# Altium PCB LMAT_AMT_V1.PcbDoc (part 2 of 2)
Units mm, origin at the board's own origin, x right, y up, seen from the top; angles counter-clockwise.
Board outline 36.5 x 40.75 mm, 2 copper layers (Top Layer, Bottom Layer), stack 1.58 mm thick; 104 components, 51 nets, 244 pads, 110 vias.
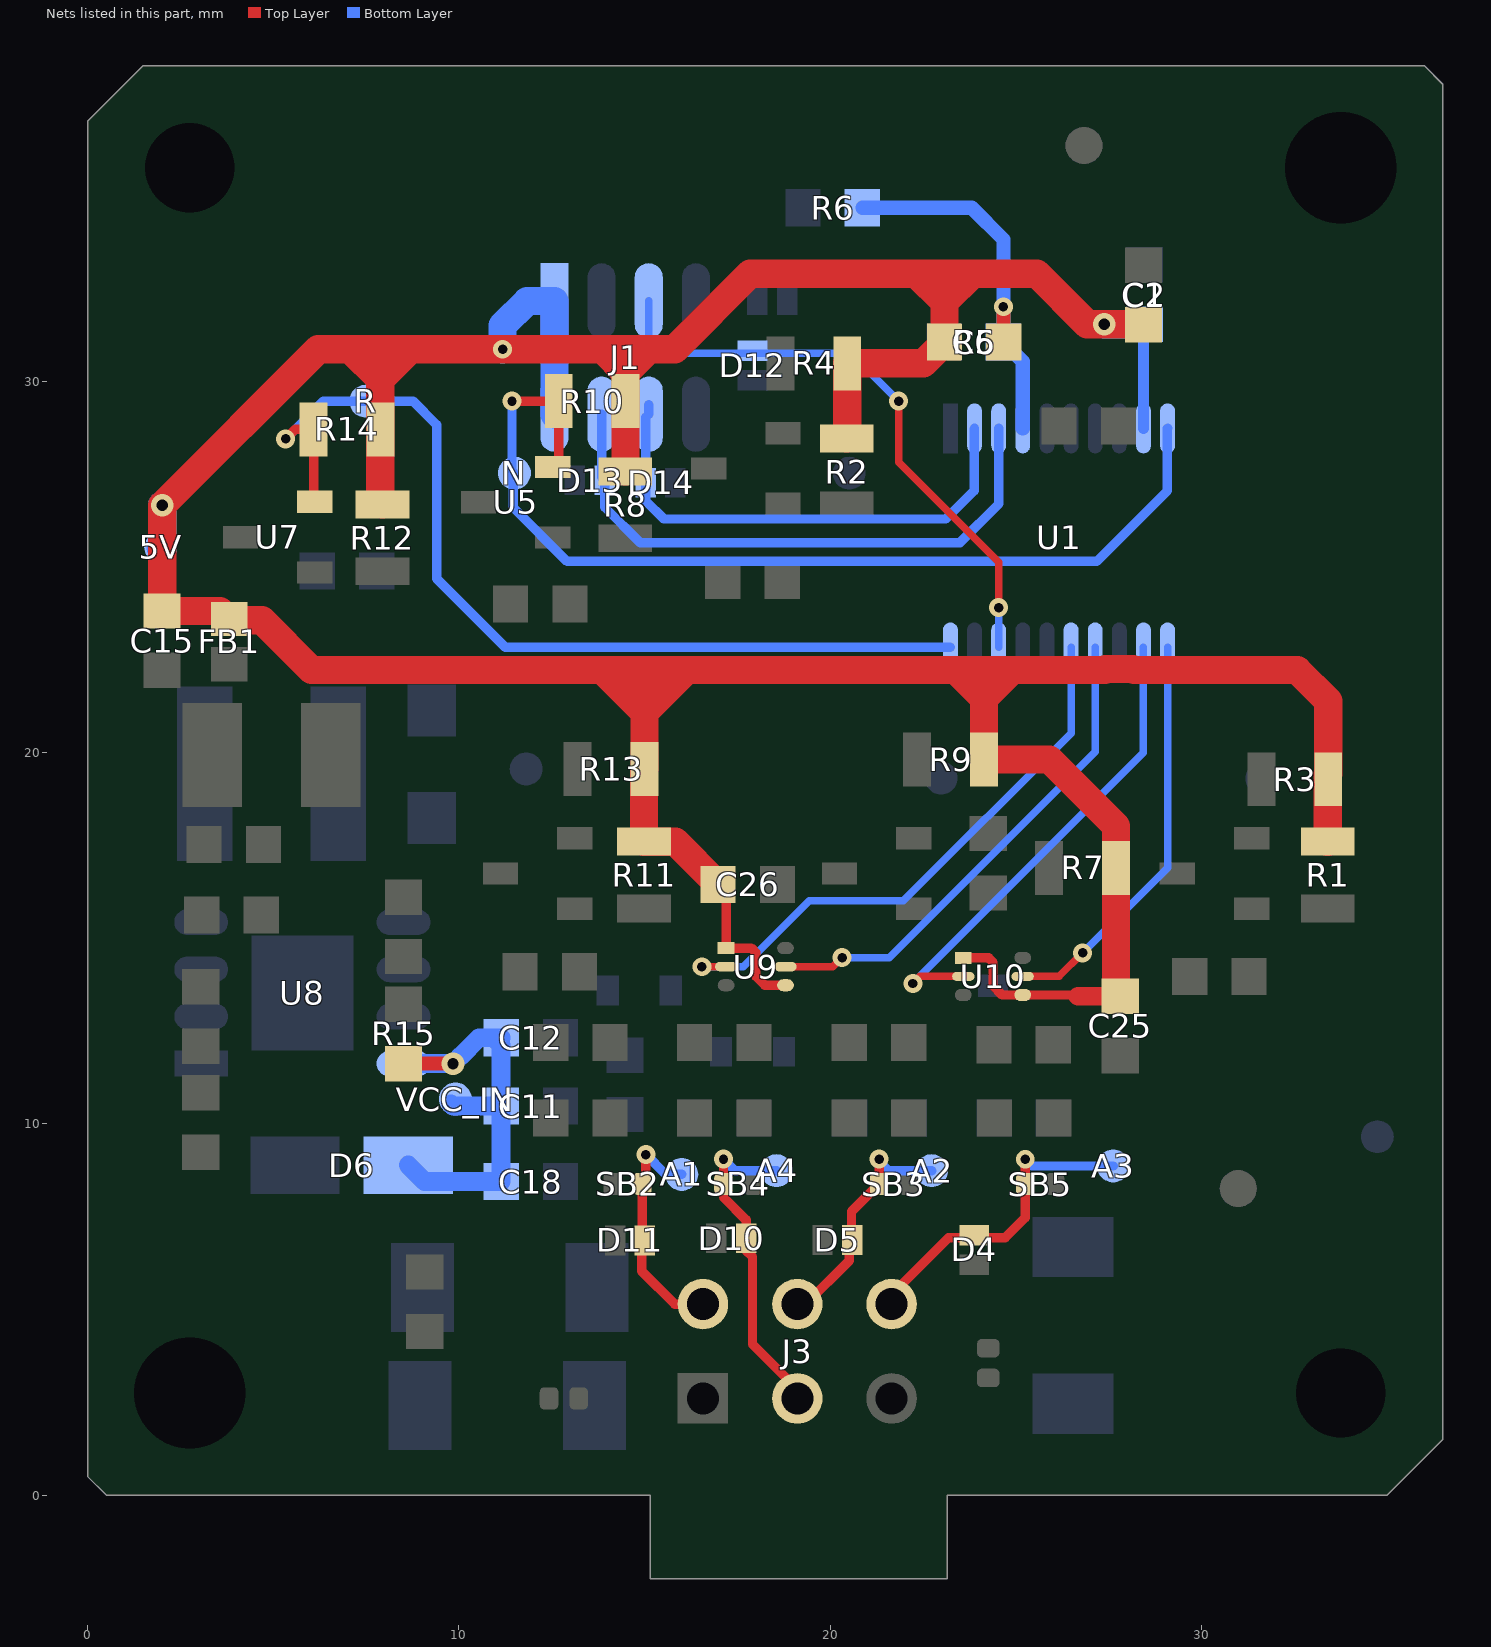
[diagram p2: the nets of this part, all layers, seen from the top]

## Via types
v1: diameter 0.508, hole 0.254, Top Layer to Bottom Layer, tented both sides, 64 vias
v2: diameter 0.61, hole 0.305, Top Layer to Bottom Layer, tented both sides, 46 vias

## Nets (pads, with @x,y where several pads share a name; then routed paths per layer and width w, separated by ;. In a path a pad name is that pad's centre, name@x,y a point inside that pad or via, vN(x,y) a via of type N, cw(c..) or ccw(c..) an arc to the next point about the centre after c; other vN are vias at no path point) (continued)
NEUTRAL: N.1 R10.2 U1.10 U5.2 | length 26.7
  Top Layer w0.254: v1(11.43,29.464) R10.2@12.689,29.464 12.689,27.849 U5.2@12.53,27.69
  Bottom Layer w0.254: v1(11.43,29.464) 11.43,27.588 11.462,27.555 11.462,26.598 12.914,25.146 27.178,25.146 29.083,27.051 29.083,28.727 U1.10@29.087,28.731
nRESET: C6.1 R5.1 R6.2 U1.4 | length 10.4
  Top Layer w0.254: R5.1@24.663,31.064 R5.1@24.676,31.051
  Top Layer w0.381: R5.1@24.663,31.064 v1(24.663,32.004)
  Bottom Layer w0.381: R6.2@20.866,34.671 23.812,34.671 24.663,33.82 v1(24.663,32.004) C6.1@24.663,31.056 25.187,30.532 U1.4@25.187,28.731
REVERSE: R14.2 R.1 U1.20 U7.2 | length 26.3
  Top Layer w0.254: v1(5.334,28.448) 5.588,28.702 R14.2@6.085,28.702 6.085,26.785 U7.2@6.12,26.75
  Bottom Layer w0.254: v1(5.334,28.448) 6.35,29.464 R.1@7.493,29.464 8.763,29.464 9.398,28.829 9.398,24.684 11.251,22.831 U1.20@23.237,22.831
S1: U1.14 U9.5 | length 13.5
  Top Layer w0.203: U9.5@18.796,14.232 20.074,14.232 v1(20.32,14.478)
  Bottom Layer w0.203: v1(20.32,14.478) 21.593,14.478 27.137,20.022 U1.14@27.137,22.831
S2: U1.11 U10.5 | length 11.1
  Top Layer w0.203: U10.5@25.184,13.97 26.162,13.97 v1(26.797,14.605)
  Bottom Layer w0.203: v1(26.797,14.605) 29.087,16.895 U1.11@29.087,22.831
S3: U1.12 U10.2 | length 13.1
  Top Layer w0.203: v1(22.225,13.779) 22.416,13.97 U10.2@23.584,13.97
  Bottom Layer w0.203: v1(22.225,13.779) 28.437,19.991 U1.12@28.437,22.831
S4: U1.15 U9.2 | length 15.5
  Top Layer w0.203: v1(16.543,14.232) U9.2@17.196,14.232
  Bottom Layer w0.203: v1(16.543,14.232) 17.661,14.232 19.431,16.002 21.971,16.002 26.487,20.518 U1.15@26.487,22.831
SIGNAL1: A1.1 D11.2 J3.4 SB2.2 | length 6.4
  Top Layer w0.254: v1(15.037,9.169) 15.037,8.477 SB2.2@14.941,8.382 14.941,6.615 14.93,6.604 14.93,6.025 15.811,5.143 J3.4@16.573,5.143
  Bottom Layer w0.254: v1(15.037,9.169) 15.57,8.636 A1.1@16.002,8.636
SIGNAL2: A2.1 D5.2 J3.5 SB3.2 | length 6.5
  Top Layer w0.254: J3.5@19.113,5.143 19.342,5.143 20.518,6.319 D5.2@20.518,6.869 ; D5.2@20.574,6.869 20.574,7.639 21.317,8.382 v1(21.317,9.049)
  Bottom Layer w0.254: v1(21.317,9.049) 21.317,8.998 21.577,8.738 A2.1@22.733,8.738
SIGNAL3: A3.1 D4.2 J3.6 SB5.2 | length 8.7
  Top Layer w0.254: J3.6@21.653,5.143 21.653,5.397 23.185,6.929 24.709,6.929 25.254,7.474 SB5.2@25.254,8.377 v1(25.254,9.044)
  Bottom Layer w0.254: v1(25.254,9.044) 25.433,8.865 A3.1@27.624,8.865
SIGNAL4: A4.1 D10.2 J3.2 SB4.2 | length 8.8
  Top Layer w0.254: v1(17.126,9.049) SB4.2@17.126,8.382 17.126,8.02 17.736,7.41 D10.2@17.736,6.92 17.736,6.591 17.907,6.419 17.907,4.064 19.113,2.857 J3.2@19.113,2.603
  Bottom Layer w0.254: v1(17.126,9.049) 17.437,8.738 A4.1@18.554,8.738
SWIM: D12.2 J1.5 U1.18 | length 16.2
  Top Layer w0.203: v1(21.844,29.464) 21.844,27.813 24.537,25.12 v1(24.537,23.901)
  Bottom Layer w0.203: J1.5@15.113,32.163 15.113,31.115 15.479,30.749 20.559,30.749 v1(21.844,29.464) ; U1.18@24.537,22.831 v1(24.537,23.901)
UART_RX: D13.2 J1.4 U1.3 | length 16
  Bottom Layer w0.254: J1.4@13.843,29.113 13.843,27.413 D13.2@13.925,27.33 13.925,26.607 14.878,25.654 23.495,25.654 24.537,26.696 U1.3@24.537,28.731
UART_TX: D14.2 J1.6 U1.2 | length 13.7
  Bottom Layer w0.254: J1.6@15.113,29.369 J1.6@15.113,29.113 15.03,29.03 D14.2@15.03,27.267 15.03,26.778 15.519,26.289 23.114,26.289 23.876,27.051 23.876,28.72 U1.2@23.887,28.731
VCC_5V: 5V.1 C1.1 C2.2 C15.1 C25.1 C26.1 FB1.2 J1.1 J1.2 R1.2 R2.2 R3.1 R4.1 R5.2 R7.2 R8.2 R9.1 R10.1 R11.2 R12.2 R13.1 R14.1 U1.9 U9.1 U9.4 U10.1 U10.4 | length 132.4
  Top Layer w0.254: C26.1@16.98,16.447 17.196,16.23 U9.1@17.196,14.732 17.877,14.732 17.996,14.613 17.996,13.978 18.242,13.732 U9.4@18.796,13.732 ; U10.1@23.584,14.47 24.265,14.47 24.384,14.351 24.384,13.716 24.63,13.47 U10.4@25.184,13.47 26.637,13.47 26.67,13.437
  Top Layer w0.508: 26.67,13.437 C25.1@27.813,13.437
  Top Layer w0.762: 7.874,30.861 7.07,30.861 ; R12.2@7.938,26.681 7.885,26.734 R14.1@7.885,28.702 7.885,30.046 ; 13.865,30.85 14.489,30.226 ; R8.2@14.478,27.57 14.489,27.581 R10.1@14.489,29.464 14.489,30.226 ; R13.1@14.986,19.547 R11.2@14.986,17.601 15.826,17.601 C26.1@16.98,16.447 ; R13.1@14.997,19.558 14.997,21.082 ; R2.2@20.447,28.459 20.458,28.47 R4.1@20.458,30.48 22.504,30.48 R5.2@23.076,31.051 23.076,32.131 ; C25.1@27.78,13.47 27.697,13.552 R7.2@27.697,16.891 27.697,18.023 25.908,19.812 R9.1@24.141,19.812 24.141,21.463 ; C1.1@28.435,31.521 28.423,31.534 v2(27.381,31.534) 26.924,31.534 25.565,32.893 23.838,32.893 ; R1.2@33.401,17.601 33.401,19.42 33.412,19.431 33.412,21.389 32.575,22.225 28.181,22.225 28.155,22.251 27.419,22.251 27.393,22.225 24.903,22.225 ; 7.07,30.861 6.21,30.861 v2(2.007,26.657) C15.1@2.007,23.812 3.559,23.812 3.81,23.562 4.696,23.562 6.032,22.225 13.854,22.225 ; 7.07,30.861 7.885,30.046 ; 7.885,30.046 8.7,30.861 ; 7.885,30.046 7.885,30.861 8.7,30.861 ; 8.7,30.861 v1(11.176,30.861) 14.489,30.861 ; 13.854,22.225 14.997,21.082 ; 13.854,22.225 14.986,22.225 ; 14.489,30.226 14.489,30.861 ; 14.489,30.226 15.113,30.85 15.113,30.861 ; 14.489,30.861 15.113,30.861 ; 14.986,22.225 14.997,22.214 14.997,21.082 ; 14.986,22.225 16.14,22.225 ; 14.997,21.082 16.14,22.225 ; 15.113,30.861 15.811,30.861 17.843,32.893 22.314,32.893 ; 16.14,22.225 23.379,22.225 ; 22.314,32.893 23.076,32.131 ; 22.314,32.893 23.076,32.893 ; 23.076,32.131 23.838,32.893 ; 23.076,32.131 23.076,32.893 ; 23.076,32.893 23.838,32.893 ; 23.379,22.225 24.141,21.463 ; 23.379,22.225 24.13,22.225 ; 24.13,22.225 24.141,22.214 24.141,21.463 ; 24.13,22.225 24.903,22.225 ; 24.141,21.463 24.903,22.225
  Bottom Layer w0.305: U1.9@28.437,28.731 C2.2@28.437,31.498
  Bottom Layer w0.762: 5V.1@1.968,25.527 2.007,25.565 v2(2.007,26.657) ; v1(11.176,30.861) 11.176,31.496 11.843,32.163 J1.1@12.573,32.163 J1.2@12.573,29.113 ; v2(27.381,31.534) 28.401,31.534 C2.2@28.437,31.498
VCC_IN: C11.2 C12.1 C18.1 D6.1 R15.2 U8.8 VCC_IN.1 | length 12.3
  Top Layer w0.381: R15.2@8.509,11.62 v2(9.842,11.62)
  Bottom Layer w0.381: v2(9.842,11.62) v2@10.033,11.811
  Bottom Layer w0.508: U8.8@8.509,11.62 v2(9.842,11.62) ; D6.1@8.637,8.89 9.082,8.445 C18.1@11.138,8.445 C11.2@11.138,10.478 ; VCC_IN.1@9.779,10.541 9.842,10.478 C11.2@11.138,10.478 ; v2@10.033,11.811 10.541,12.319 C12.1@10.935,12.319 ; C12.1@11.138,12.319 C12.1@10.935,12.319 ; C12.1@10.935,12.319 11.138,12.116 C11.2@11.138,10.478
pads on no net: FID1.0 FID2.0 FID3.0 FID4.0 U1.5 U1.6 U1.17

## Polygon pours and split planes (outlines as drawn)
GND on Top Layer "GND_L01_P070" (solid, remove dead copper, pour order 70): 0.5,0 35,0 36.5,1.5 36.5,38 36,38.5 1.5,38.5 0,37 0,0.5
GND on Bottom Layer "GND_L02_P071" (solid, remove dead copper, pour order 71): 35,0 36.5,1.5 36.5,38 36,38.5 1.5,38.5 0,37 0,0.5 0.5,0

## Keep-outs
Keep-Out Layer:
  lines w0.127: 0,5.651 cw(c2.749,2.749) 5.651,0 ; 0,32.842 ccw(c2.75,35.75) 5.649,38.51 ; 30.842,38.5 ccw(c33.744,35.744) 36.5,32.842 ; 30.861,0 cw(c33.745,2.762) 36.5,5.652 ; 1.5,38.5 36,38.5 36.5,38 36.5,1.5 35,0 23.15,0 23.15,-2.25 15.15,-2.25 15.15,0 0.5,0 0,0.5 0,37 1.5,38.5 ; 1.5,38.5 1.5,38.5
  text "'.Layer_Name'" at 402.844,-241.071 h3.81

## Other copper
Top Layer:
  pour cut-out: 8.572,24.118 8.572,23.114 8.318,23.114 8.318,24.118
  pour cut-out: 11.938,27.223 11.938,26.257 11.684,26.257 11.684,27.223
  pour cut-out: 18.572,13.169 18.784,13.169 18.784,12.903 18.572,12.903
  pour cut-out: 22.132,13.064 21.92,13.064 21.92,13.33 22.132,13.33
  pour cut-out: 23.709,12.81 23.709,12.598 23.195,12.598 23.195,12.81
  pour cut-out: 15.961,15.616 15.961,15.828 16.475,15.828 16.475,15.616
  pour cut-out: 12.985,21.015 12.773,21.015 12.773,21.53 12.985,21.53
  pour cut-out: 23.143,15.16 23.355,15.16 23.355,14.894 23.143,14.894
  pour cut-out: 26.424,17.842 26.274,17.992 26.462,18.18 26.612,18.03
  pour cut-out: 21.6,20.59 21.6,21.53 21.866,21.53 21.866,20.59
  pour cut-out: 21.483,27.266 22.035,27.266 22.035,27 21.483,27
  pour cut-out: 25.462,31.455 25.462,31.667 25.947,31.667 25.947,31.455
  pour cut-out: 28.031,30.656 28.243,30.656 28.243,30.39 28.031,30.39
  pour cut-out: 31.949,17.107 32.389,17.107 32.372,17.09 32.372,16.209 32.112,16.209 31.944,16.377
  text "'.Layer_Name'" at 396.875,-241.325 h3.81
Bottom Layer:
  pour cut-out: 10.951,30.038 11.006,30.092 11.334,30.092 11.303,29.718 11.247,29.662 10.951,29.662
  pour cut-out: 14.458,14.348 15.26,14.348 15.26,14.117 15.24,14.097 14.478,14.097
  pour cut-out: 10.225,6.937 10.225,7.936 10.16,8.001 9.906,8.001 9.906,6.985
  pour cut-out: 27.477,9.469 27.477,9.752 27.611,9.752 27.624,9.74 27.624,9.469
  pour cut-out: 22.859,18.78 22.859,17.145 22.408,17.145 22.397,18.78
  pour cut-out: 21.844,20.39 21.844,19.742 21.406,19.742 21.402,20.39
  pour cut-out: 7.397,11.62 7.397,10.094 7.559,9.931 8.509,9.931 8.509,11.62
  pour cut-out: 23.431,13.028 23.46,13.057 23.835,13.057 23.835,13.198 23.766,13.267 23.404,13.267
  pour cut-out: 18.491,27.322 18.491,26.842 18.445,26.797 18.923,26.797 18.923,27.305
  pour cut-out: 23.437,29.794 23.368,29.863 23.368,30.34 23.749,30.34 23.749,29.762
  pour cut-out: 7.622,16.794 7.926,16.794 7.926,16.961 7.92,16.954 7.785,16.954
  pour cut-out: 18.35,31.686 18.161,31.686 18.161,31.261 18.35,31.261
  pour cut-out: 10.54,14.348 10.54,13.11 10.544,13.106 10.185,13.106 10.185,14.351
  pour cut-out: 13.97,26.715 13.97,25.67 14.351,25.67 14.351,26.692
  pour cut-out: 17.03,29.808 17.424,29.808 17.424,29.928 17.348,30.004 17.335,29.991 17.03,29.991
  text "'.Layer_Name'" at 400.05,-241.325 h3.81

## Silkscreen, mask and mechanical layers (free items; w line width, h text height)
Top Overlay:
  text "LMAT_AMT_V1" at 9.995,34.176 h2.03
  text "'.Layer_Name'" at 400.177,-241.071 h3.81
Bottom Overlay:
  lines w0.127: 13.081,14.351 13.081,13.335 13.843,12.573 13.843,12.446 ; 13.386,9.779 13.716,9.449
  lines w0.203: 3.861,10.566 4.564,10.566 ; 3.886,10.332 3.655,10.564 3.886,10.795
  text "'.Layer_Name'" at 401.193,-240.69 h3.81
Top Paste:
  text "'.Layer_Name'" at 404.876,-240.817 h3.81
Bottom Paste:
  text "'.Layer_Name'" at 404.876,-241.325 h3.81
Top Solder:
  rectangle: 23.19,13.106 25.552,14.834
  rectangle: 16.815,13.368 19.164,15.096
  rectangle: 23.495,5.969 24.257,7.239
  region: 19.558,7.25 19.558,6.488 20.828,6.488 20.828,7.25
  region: 16.7,7.301 16.7,6.539 17.97,6.539 17.97,7.301
  region: 13.97,7.239 13.97,6.477 15.24,6.477 15.24,7.239
  text "'.Layer_Name'" at 407.162,-240.817 h3.81
Bottom solder:
  region: 16.044,26.784 16.044,27.75 14.774,27.75 14.774,26.784
  region: 14.139,26.848 14.139,27.813 12.869,27.813 12.869,26.848
  region: 19.082,31.813 19.082,32.575 17.812,32.575 17.812,31.813
  rectangle: 17.534,29.797 18.296,31.067
Drill Guide:
  text "'.Layer_Name'" at 408.178,-241.198 h3.81
Fabrication Notes:
  drawing of 191 lines, arcs and shapes, not listed
  text "Layer" at 123.685,144.691 h1.52
  text "Name" at 134.097,144.691 h1.52
  text "Material" at 157.713,144.691 h1.52
  text "Thickness" at 179.551,144.691 h1.52
  text "Constant" at 196.056,144.691 h1.52
  text "Board Layer Stack" at 210.531,144.691 h1.52
  text "1" at 123.685,141.643 h1.52
  text "Top Overlay" at 134.097,141.643 h1.52
  text "2" at 123.685,138.595 h1.52
  text "Top Solder" at 134.097,138.595 h1.52
  text "Solder Resist" at 157.713,138.595 h1.52
  text "0.40mil" at 179.551,138.595 h1.52
  text "3.5" at 196.056,138.595 h1.52
  text "3" at 123.685,135.547 h1.52
  text "Top Layer" at 134.097,135.547 h1.52
  text "Copper" at 157.713,135.547 h1.52
  text "1.40mil" at 179.551,135.547 h1.52
  text "4" at 123.685,132.499 h1.52
  text "Dielectric 1" at 134.097,132.499 h1.52
  text "FR-4" at 157.713,132.499 h1.52
  text "59.39mil" at 179.551,132.499 h1.52
  text "4.2" at 196.056,132.499 h1.52
  text "5" at 123.685,129.451 h1.52
  text "Bottom Layer" at 134.097,129.451 h1.52
  text "Copper" at 157.713,129.451 h1.52
  text "1.40mil" at 179.551,129.451 h1.52
  text "6" at 123.685,126.403 h1.52
  text "Bottom solder" at 134.097,126.403 h1.52
  text "Solder Resist" at 157.713,126.403 h1.52
  text "0.40mil" at 179.551,126.403 h1.52
  text "3.5" at 196.056,126.403 h1.52
  text "7" at 123.685,123.355 h1.52
  text "Bottom Overlay" at 134.097,123.355 h1.52
  text "Total Pcb Thickness = 1.6MM +/- 10%" at 133.491,109.125 h2.54
  text "Finished cu Thickness: 1 OZ" at 143.67,102.751 h2.54
  text "FABRICATION NOTES:" at -278.643,17.706 h2.03
  text "1. LATEST VERSION OF ALL REFERENCED IPC SPECIFICATIONS TO BE USED." at -278.643,12.626 h1.78
  text "2. ALL MULTILAYER PC BOARDS MUST BE PRODUCED IN ACCORDANCE IPC-A-600, CLASS 2." at -278.643,7.547 h1.78
  text "3. INSPECT ALL MULTILAYER PC BOARDS IN ACCORDANCE WITH IPC-6012, CLASS 2." at -278.643,2.467 h1.78
  text "4. MATERIAL:  THIN LAMINATE, FR4 COPPER CLAD 1 OZ PER LAYER (EXTERNAL LAYERS)" at -278.643,-2.613 h1.78
  text "1.6 MM +/-10% THICK, COLOR GREEN," at -273.614,-6.043 h1.78
  text "MINIMUM CTI (PER IEC 60112 USING SOLUTION A) = 175." at -273.614,-9.853 h1.78
  text "5. FABRICATE BOARDS USING THE GERBER FILES CONTAINED IN FABRICATION FOLDER." at -278.643,-15.313 h1.78
  text "6. DRILL DATA ARE CONTAINED IN THE FABRICATION FOLDER." at -278.643,-20.647 h1.78
  text "7. ALL HOLE DIAMETERS MUST BE PER DRILL CHART +/-0.003 INCHES TOLERANCE," at -278.643,-25.854 h1.78
  text "UNLESS OTHERWISE SPECIFIED." at -273.563,-29.589 h1.78
  text "8. PLATED-THRU HOLES TO HAVE COPPER WALL THICKNESS NOT LESS THAN 0.001 INCHES." at -278.643,-34.744 h1.78
  text "THICKNESS TO BE DETERMINED BY IPC-6012, CLASS 2." at -274.071,-38.428 h1.78
  text "9. SURFACE FINISH PROCESS MUST BE ENIG." at -278.643,-43.634 h1.78
  text "10. SILKSCREEN BOTH SIDES WITH WHITE EPOXY NON-CONDUCTIVE INK." at -278.643,-48.08 h1.78
  text "SILKSCREEN MAY BE TRIMMED OFF ANY SOLDERED ENTITY." at -272.141,-51.89 h1.78
  text "11. SOLDER MASK BOTH SIDES WITH LIQUID PHOTO IMAGEABLE SOLDER MASK (LPI)," at -278.643,-56.97 h1.78
  text "MEETING IPC-SM-840, CLASS 2, HIGH PERFORMANCE SPECIFICATIONS." at -272.293,-60.476 h1.78
  text "FINISH: SOLDER MASK OVER BARE COPPER (SMOBC)." at -272.293,-64.413 h1.78
  text "12. WARP AND TWIST SHALL BE LESS THAN 0.0075 INCH PER INCH." at -278.643,-69.924 h1.78
  text "INSPECT PER IPC-TM-650, 2.4.22." at -272.141,-73.531 h1.78
  text "13. ALL BOARDS MUST BE DATE CODED USING A FOUR DIGIT CODE," at -278.643,-78.433 h1.78
  text "YEAR FOLLOWED BY WEEK (e.g. 0449 = 49TH WEEK OF 2004)." at -272.141,-82.04 h1.78
  text "14. ALL DIMENSIONS AND HOLE DIAMETERS APPLY TO THE FINISHED BOARD." at -278.643,-87.45 h1.78
  text "15. PADS MUST BE FINISHED TO WITHIN +/-0.0015 INCHES OF THE MINOR DIMENSION (PAD WIDTH)" at -278.643,-92.403 h1.78
  text "AND +/-0.002 INCHES OF THE MAJOR DIMENSION (PAD LENGTH)." at -272.064,-96.264 h1.78
  text "16. FIDUCIALS MUST BE FREE OF ANY MARKINGS." at -278.643,-100.912 h1.78
  text "17. BARE BOARD TO BE ELECTRICALLY TESTED IN ACCORDANCE WITH IPC-ET-652 AND MARKED AS TESTED." at -278.643,-106.119 h1.78
  text "18. BOARDS SHALL BE UL-RECOGNIZED AND UL-MARKED. UL FIRE RETARDANT RATING 94V-0 OR HIGHER." at -278.643,-111.199 h1.78
  text "19. ROHS: ALL MATERIALS MUST BE COMPLIANT WITH THE ROHS DIRECTIVE." at -278.643,-116.279 h1.78
  text "20. EACH PCB MUST BE INDIVIDUALLY BAGGED." at -279.273,-121.666 h1.78
  text "'.Layer_Name'" at 397.637,-241.325 h3.81
Board Outlines:
  the board outline again, w0.127
Bottom Component Outlines:
  lines w0.127: -352.935,-131.666 -345.315,-131.666 ; -352.935,-4.666 -345.315,-4.666 ; -352.935,122.334 -345.315,122.334 ; -251.335,-258.666 -251.335,-251.046 ; -251.335,241.714 -251.335,249.334 ; -149.735,-258.666 -149.735,-251.046 ; -149.735,241.714 -149.735,249.334 ; -48.135,-258.666 -48.135,-251.046 ; -48.135,241.714 -48.135,249.334 ; 53.465,-258.666 53.465,-251.046 ; 53.465,241.714 53.465,249.334 ; 155.065,-258.666 155.065,-251.046 ; 155.065,241.714 155.065,249.334 ; 256.665,-258.666 256.665,-251.046 ; 256.665,241.714 256.665,249.334 ; 302.385,-251.046 337.945,-251.046 452.245,-251.046 ; 358.265,-258.666 358.265,-251.046 ; 358.265,241.714 358.265,249.334 ; 452.245,-220.566 452.245,-251.046 ; 452.245,-131.666 459.865,-131.666 ; 452.245,-4.666 459.865,-4.666 ; 452.245,122.334 459.865,122.334 ; 452.245,-251.046 452.245,241.714 -345.315,241.714 -345.315,-251.046 452.245,-251.046 ; -352.935,-258.666 -352.935,249.334 459.865,249.334 459.865,-258.666 -352.935,-258.666
  lines w0.254: 266.724,-250.947 299.744,-250.947 452.144,-250.947 452.144,-212.847 ; 266.724,-203.458 452.017,-203.458 ; 299.744,-243.327 360.704,-243.327 452.144,-243.327 ; 299.744,-235.707 360.704,-235.707 452.009,-235.707 ; 299.744,-228.087 360.704,-228.087 452.144,-228.087 ; 299.744,-220.467 360.704,-220.467 ; 325.144,-250.947 325.144,-243.327 ; 335.304,-235.707 335.304,-212.847 ; 360.704,-250.947 360.704,-212.847 ; 383.564,-250.947 383.564,-243.327 ; 393.724,-250.947 393.724,-243.327 ; 441.984,-250.947 441.984,-243.327 ; 266.724,-212.847 299.744,-212.847 ; 266.724,-212.847 266.724,-250.995 299.744,-250.995 299.744,-212.847 ; 266.724,-212.847 266.724,-193.044 452.144,-193.044 452.144,-212.847 ; 299.744,-212.847 452.144,-212.847
  text "1" at -302.592,244.508 h1.78
  text "2" at -201.119,244.508 h1.78
  text "3" at -99.646,244.508 h1.78
  text "4" at 1.98,244.508 h1.78
  text "5" at 103.537,244.508 h1.78
  text "6" at 205.095,244.508 h1.78
  text "7" at 306.737,244.508 h1.78
  text "8" at 408.21,244.508 h1.78
  text "A" at -349.76,183.599 h1.78
  text "A" at 455.42,183.599 h1.78
  text "B" at -349.76,56.599 h1.78
  text "B" at 455.42,56.599 h1.78
  text "C" at -349.76,-70.401 h1.78
  text "C" at 455.42,-70.401 h1.78
  text "D" at -349.76,-197.401 h1.78
  text "D" at 455.42,-197.401 h1.78
  text "THE INFORMATION CONTAINED IN THIS DOCUMENT IS PROPRIETARY OF CUSTOMER." at 448.086,-197.727 h1.91
  text "ANY PRODUCTION IN PART OR WHOLE WITHOUT PRIOR WRITTEN AUTHORIZATION OF CUSTOMER IS PROHIBITED." at 448.293,-201.626 h1.91
  text "CUSTOMER:  LUMAX" at 408.466,-209.576 h2.54
  text "DATE" at 358.291,-215.514 h1.14
  text "Drawn By: Harshavardhan K" at 333.145,-215.641 h1.14
  text "UNLESS OTHERWISE" at 298.611,-217.45 h1.78
  text "Design Partner:" at 447.445,-218.714 h2.54
  text "'.Print_Date'" at 358.672,-219.324 h1.78
  text "SPECIFIED:" at 297.966,-220.213 h1.78
  text "DATE" at 358.418,-223.134 h1.14
  text "ALL DIMENSIONS ARE" at 298.865,-223.419 h1.78
  text "Designed By : Vijendra N" at 333.094,-223.515 h1.14
  text "EmbDes Technologies Pvt. Ltd." at 447.445,-224.27 h2.54
  text "'.Print_Date'" at 358.672,-226.944 h1.78
  text "IN INCHES" at 297.407,-227.02 h1.78
  text "DATE" at 358.672,-230.5 h1.14
  text "Checked By : Uday Kumar K" at 333.094,-230.627 h1.14
  text "TOLERANCES" at 296.137,-230.83 h1.78
  text "PROJECT NAME:    LMAT_AMT_V1" at 447.445,-233.096 h2.03
  text "(DECIMAL):" at 297.407,-233.37 h1.78
  text "'.Print_Date'" at 358.672,-234.31 h1.78
  text ".X +/-0.1" at 297.407,-237.18 h1.78
  text "REF ID" at 358.748,-238.659 h1.14
  text ".XX +/-0.01" at 297.214,-239.929 h1.78
  text "'.Layer_Name'" at 382.143,-240.69 h3.81
  text "LAYER NAME:" at 447.445,-240.945 h2.03
  text "ASSY BOTTOM" at 422.732,-241.911 h3.81
  text ".XXX +/-0.005" at 297.087,-242.723 h1.78
  text "Scale" at 322.868,-245.898 h1.14
  text "Size" at 390.803,-245.994 h1.14
  text "REV" at 449.223,-245.994 h1.14
  text "ANGLES +/-0.5" at 293.597,-246.07 h1.78
  text "Sheet     of" at 379.881,-246.121 h1.14
  text "DWG NO" at 440.343,-246.152 h1.14
  text "DO NOT SCALE" at 356.523,-246.787 h1.78
  text "1:1" at 314.603,-248.534 h1.78
  text "1" at 368.247,-248.915 h1.78
  text "1" at 378.24,-248.946 h1.78
  text "D" at 388.872,-249.141 h2.29
  text "1.0" at 449.35,-249.169 h1.78
  text "DRAWING" at 356.523,-249.962 h1.78
  text "1" at -302.592,-255.745 h1.78
  text "2" at -201.119,-255.745 h1.78
  text "3" at -99.646,-255.745 h1.78
  text "4" at 1.98,-255.745 h1.78
  text "5" at 103.537,-255.745 h1.78
  text "6" at 205.095,-255.745 h1.78
  text "7" at 306.737,-255.745 h1.78
  text "8" at 408.21,-255.745 h1.78
Dimensions:
  lines w0.127: 1.5,38.5 1.5,38.5 ; 1.5,38.5 0,37 0,0.5 0.5,0 15.15,0 15.15,-2.25 23.15,-2.25 23.15,0 35,0 36.5,1.5 36.5,38 36,38.5 1.5,38.5
  lines w0.203: 0,-1.27 0,0.182
  text "'.Layer_Name'" at 398.653,-240.944 h3.81
Assembly Notes:
  text "ASSEMBLY NOTES:" at -290.859,136.133 h2.03
  text "CAUTION :" at -291.011,132.41 h2.03
  text "COMPONENTS ARE SUBJECT TO DAMAGE BY STATIC ELECTRICITY." at -275.721,132.207 h2.03
  text "1. SERIALIZATION PER #900-984." at -276.127,128.371 h2.03
  text "2.  REFER BOM FOR COMPONENT PLACEMENT." at -276.584,123.672 h2.03
  text "3. MARK WITH SERIAL NUMBER ON A STICKER PASTED." at -276.66,118.872 h2.03
  text "4.  LABELS SHALL NOT TO BE PLACED OVER EXPOSED COPPER." at -276.508,114.131 h2.03
  text "5. MANUFACTURE PER TS 16469 STANDARD." at -276.381,109.906 h2.03
  text "6. BOARD MUST BE CLEANED EVEN IF USING NO CLEAN FLUX." at -276.381,105.715 h2.03
  text "7.  ASSEMBLY SHALL BE ELECTRICALLY TESTED." at -276.254,101.524 h2.03
  text "8.  SOLDER AND ASSEMBLE AS PER INDUSTRY WORKMANSHIP STANDARDS." at -276.254,97.206 h2.03
  text "9. ASSEMBLY MUST BE ROHS COMPLIANT." at -276.508,93.015 h2.03
Bottom Assembly:
  text "'.Layer_Name'" at 397.637,-240.944 h3.81
Top Component Outlines:
  lines w0.127: -352.054,-131.912 -344.434,-131.912 ; -352.054,-4.912 -344.434,-4.912 ; -352.054,122.088 -344.434,122.088 ; -250.454,-258.912 -250.454,-251.292 ; -250.454,241.468 -250.454,249.088 ; -148.854,-258.912 -148.854,-251.292 ; -148.854,241.468 -148.854,249.088 ; -47.254,-258.912 -47.254,-251.292 ; -47.254,241.468 -47.254,249.088 ; 54.346,-258.912 54.346,-251.292 ; 54.346,241.468 54.346,249.088 ; 155.946,-258.912 155.946,-251.292 ; 155.946,241.468 155.946,249.088 ; 257.546,-258.912 257.546,-251.292 ; 257.546,241.468 257.546,249.088 ; 303.266,-251.292 338.826,-251.292 453.126,-251.292 ; 359.146,-258.912 359.146,-251.292 ; 359.146,241.468 359.146,249.088 ; 453.126,-220.812 453.126,-251.292 ; 453.126,-131.912 460.746,-131.912 ; 453.126,-4.912 460.746,-4.912 ; 453.126,122.088 460.746,122.088 ; 453.126,-251.292 453.126,241.468 -344.434,241.468 -344.434,-251.292 453.126,-251.292 ; -352.054,-258.912 -352.054,249.088 460.746,249.088 460.746,-258.912 -352.054,-258.912
  lines w0.254: 267.577,-251.241 300.597,-251.241 ; 267.577,-203.752 452.87,-203.752 ; 300.47,-251.241 267.587,-251.241 267.577,-251.231 267.577,-213.141 ; 300.597,-243.621 361.557,-243.621 452.997,-243.621 ; 300.597,-236.001 361.557,-236.001 452.862,-236.001 ; 300.597,-228.381 361.557,-228.381 452.997,-228.381 ; 300.597,-220.761 361.557,-220.761 ; 325.997,-251.241 325.997,-243.621 ; 336.157,-236.001 336.157,-213.141 ; 361.557,-251.241 361.557,-213.141 ; 384.417,-251.241 384.417,-243.621 ; 394.577,-251.241 394.577,-243.621 ; 442.837,-251.241 442.837,-243.621 ; 267.577,-213.141 300.597,-213.141 ; 267.577,-213.141 267.577,-193.338 452.997,-193.338 452.997,-213.141 ; 300.597,-251.241 300.597,-213.141 ; 300.597,-251.241 452.997,-251.241 452.997,-213.141 ; 300.597,-213.141 452.997,-213.141
  text "1" at -301.711,244.262 h1.78
  text "2" at -200.238,244.262 h1.78
  text "3" at -98.765,244.262 h1.78
  text "4" at 2.861,244.262 h1.78
  text "5" at 104.418,244.262 h1.78
  text "6" at 205.976,244.262 h1.78
  text "7" at 307.618,244.262 h1.78
  text "8" at 409.091,244.262 h1.78
  text "A" at -348.879,183.353 h1.78
  text "A" at 456.301,183.353 h1.78
  text "B" at -348.879,56.353 h1.78
  text "B" at 456.301,56.353 h1.78
  text "C" at -348.879,-70.647 h1.78
  text "C" at 456.301,-70.647 h1.78
  text "THE INFORMATION CONTAINED IN THIS DOCUMENT IS PROPRIETARY OF CUSTOMER." at 268.726,-197.513 h1.91
  text "D" at -348.879,-197.647 h1.78
  text "D" at 456.301,-197.647 h1.78
  text "ANY PRODUCTION IN PART OR WHOLE WITHOUT PRIOR WRITTEN AUTHORIZATION OF CUSTOMER IS PROHIBITED." at 268.933,-201.412 h1.91
  text "CUSTOMER:  LUMAX" at 315.64,-209.324 h2.54
  text "Drawn By : Harshavardhan K" at 303.137,-215.681 h1.14
  text "DATE" at 338.697,-215.681 h1.14
  text "UNLESS OTHERWISE" at 270.117,-218.221 h1.78
  text "Design Partner:" at 363.843,-218.341 h2.54
  text "'.Print_Date'" at 338.697,-219.491 h1.78
  text "SPECIFIED:" at 276.467,-220.761 h1.78
  text "Designed By : Vijendra N" at 302.679,-223.301 h1.14
  text "DATE" at 338.697,-223.301 h1.14
  text "EmbDes Technologies Pvt. Ltd." at 363.843,-223.86 h2.54
  text "ALL DIMENSIONS ARE" at 268.847,-224.571 h1.78
  text "'.Print_Date'" at 338.697,-227.111 h1.78
  text "IN INCHES" at 275.908,-227.568 h1.78
  text "Checked By : Uday Kumar K" at 302.679,-230.921 h1.14
  text "DATE" at 338.697,-230.921 h1.14
  text "TOLERANCES" at 274.638,-231.378 h1.78
  text "PROJECT NAME:  AMT" at 363.843,-233.39 h2.03
  text "(DECIMAL):" at 275.908,-233.918 h1.78
  text "'.Print_Date'" at 338.697,-234.731 h1.78
  text ".X +/-0.1" at 275.908,-237.728 h1.78
  text "REF ID" at 303.137,-238.541 h1.14
  text ".XX +/-0.01" at 274.638,-240.268 h1.78
  text "LAYER NAME:" at 363.843,-240.756 h2.03
  text "ASSY TOP" at 394.206,-242.422 h3.81
  text ".XXX +/-0.005" at 272.098,-242.808 h1.78
  text "Scale" at 303.137,-246.161 h1.14
  text "Sheet     of" at 364.097,-246.161 h1.14
  text "Size" at 386.957,-246.161 h1.14
  text "DWG NO" at 397.117,-246.161 h1.14
  text "REV" at 445.377,-246.161 h1.14
  text "ANGLES +/-0.5" at 272.098,-246.618 h1.78
  text "DO NOT SCALE" at 332.347,-247.431 h1.78
  text "1:1" at 310.757,-248.701 h1.78
  text "1" at 366.637,-249.209 h1.78
  text "1" at 379.337,-249.336 h1.78
  text "D" at 388.227,-249.336 h2.29
  text "1.0" at 445.504,-249.336 h1.78
  text "DRAWING" at 336.157,-249.971 h1.78
  text "1" at -301.711,-255.991 h1.78
  text "2" at -200.238,-255.991 h1.78
  text "3" at -98.765,-255.991 h1.78
  text "4" at 2.861,-255.991 h1.78
  text "5" at 104.418,-255.991 h1.78
  text "6" at 205.976,-255.991 h1.78
  text "7" at 307.618,-255.991 h1.78
  text "8" at 409.091,-255.991 h1.78
Drill Drawing:
  lines w0.254: -102.659,125.048 -102.236,125.048 -101.813,124.625 -101.389,125.048 -100.966,125.048 -101.389,125.472 -100.966,125.895 -101.389,125.895 -101.813,126.318 -102.236,125.895 -102.659,125.895 -102.236,125.472 -102.659,125.048 ; -102.659,128.435 -101.813,128.858 -100.966,128.435 -101.389,129.282 -100.966,130.128 -101.813,129.705 -102.659,130.128 -102.236,129.282 -102.659,128.435 ; -102.659,132.668 -102.236,132.668 -102.236,132.245 -101.389,132.245 -101.389,132.668 -100.966,132.668 -100.966,133.515 -101.389,133.515 -101.389,133.938 -102.236,133.938 -102.236,133.515 -102.659,133.515 -102.659,132.668 ; -102.659,137.748 -100.966,137.748 -101.813,136.055 -102.659,137.748 ; -102.659,139.865 -100.966,139.865 -100.966,141.558 -102.659,141.558 -102.659,139.865
  lines w0.381: -104.178,123.482 76.672,123.482 ; -104.178,142.532 76.672,142.532 ; -90.186,119.672 -90.186,146.342 ; -75.204,119.672 -75.204,146.342 ; -46.764,119.672 -46.764,146.342 ; -33.915,119.672 -33.915,146.342 ; -15.276,119.672 -15.276,146.342 ; 22.812,119.672 22.812,146.342 ; 37.794,119.672 37.794,146.342 ; 56.738,119.672 56.738,146.342 ; -104.178,119.672 76.672,119.672 76.672,146.342 -104.178,146.342 -104.178,119.672
  text "Symbol" at -101.892,143.675 h1.83
  text "Count" at -89.043,143.675 h1.83
  text "Hole Size" at -74.061,143.675 h1.83
  text "Plated" at -45.621,143.675 h1.83
  text "Hole Type" at -32.772,143.675 h1.83
  text "Drill Layer Pair" at -14.133,143.675 h1.83
  text "Via/Pad" at 23.955,143.675 h1.83
  text "Pad Shape" at 38.937,143.675 h1.83
  text "Template" at 57.881,143.675 h1.83
  text "2" at -89.043,139.865 h1.52
  text "2.400mm (94.49mil)" at -74.061,139.865 h1.52
  text "NPTH" at -45.621,139.865 h1.52
  text "Round" at -32.772,139.865 h1.52
  text "Top Layer - Bottom Layer" at -14.133,139.865 h1.52
  text "Pad" at 23.955,139.865 h1.52
  text "Rounded" at 38.937,139.865 h1.52
  text "c10hn240" at 57.881,139.865 h1.52
  text "2" at -89.043,136.055 h1.52
  text "3.000mm (118.11mil)" at -74.061,136.055 h1.52
  text "NPTH" at -45.621,136.055 h1.52
  text "Round" at -32.772,136.055 h1.52
  text "Top Layer - Bottom Layer" at -14.133,136.055 h1.52
  text "Pad" at 23.955,136.055 h1.52
  text "Rounded" at 38.937,136.055 h1.52
  text "c10hn300" at 57.881,136.055 h1.52
  text "6" at -89.043,132.245 h1.52
  text "0.860mm (33.86mil)" at -74.061,132.245 h1.52
  text "PTH" at -45.621,132.245 h1.52
  text "Round" at -32.772,132.245 h1.52
  text "Top Layer - Bottom Layer" at -14.133,132.245 h1.52
  text "Pad" at 23.955,132.245 h1.52
  text "(Mixed)" at 38.937,132.245 h1.52
  text "(Mixed)" at 57.881,132.245 h1.52
  text "46" at -89.043,128.435 h1.52
  text "0.305mm (12.00mil)" at -74.061,128.435 h1.52
  text "PTH" at -45.621,128.435 h1.52
  text "Round" at -32.772,128.435 h1.52
  text "Top Layer - Bottom Layer" at -14.133,128.435 h1.52
  text "Via" at 23.955,128.435 h1.52
  text "Rounded" at 38.937,128.435 h1.52
  text "v61h30m0mx0" at 57.881,128.435 h1.52
  text "64" at -89.043,124.625 h1.52
  text "0.254mm (10.00mil)" at -74.061,124.625 h1.52
  text "PTH" at -45.621,124.625 h1.52
  text "Round" at -32.772,124.625 h1.52
  text "Top Layer - Bottom Layer" at -14.133,124.625 h1.52
  text "Via" at 23.955,124.625 h1.52
  text "Rounded" at 38.937,124.625 h1.52
  text "v51h25m0mx0" at 57.881,124.625 h1.52
  text "120 Total" at -89.043,120.815 h1.52
  text "'.Layer_Name'" at 406.4,-241.071 h3.81
DXF TOP:
  drawing of 18003 lines, arcs and shapes, not listed

## Dimensions
0,0.5 to 36.5,1.5 on Dimensions
23.15,-2.25 to 36.5,38.5 on Dimensions

## Text inside footprints (layer, text, board x,y; h text height)
D1: Bottom Overlay "K" at 11.43,17.78 h1.02 r270; Bottom Component Outlines "K" at 8.797,16.446 h1 r270
D2: Bottom Overlay "K" at 25.4,11.684 h0.76 r270
D3: Bottom Overlay "K" at 19.782,11.938 h0.71
D6: Bottom Overlay "K" at 10.414,7.112 h0.76
D8: Bottom Overlay "K" at 16.383,11.684 h0.76
D9: Bottom Overlay "K" at 14.351,14.605 h0.76
J1: Bottom Overlay "PCB EDGE" at 12.192,36.15 h1.02 r180; Bottom Component Outlines "PCB EDGE" at 12.192,36.15 h1.02 r180
J3: Top Component Outlines "PCB EDGE" at 22.035,-2.73 h0.76 r180